# Altium PCB Motherboard.PcbDoc
Units mm, origin at the board's own origin, x right, y up, seen from the top; angles counter-clockwise.
Board outline 29.5 x 50.36 mm, 2 copper layers (Top Layer, Bottom Layer); 8 components, 13 nets, 52 pads, 0 vias.
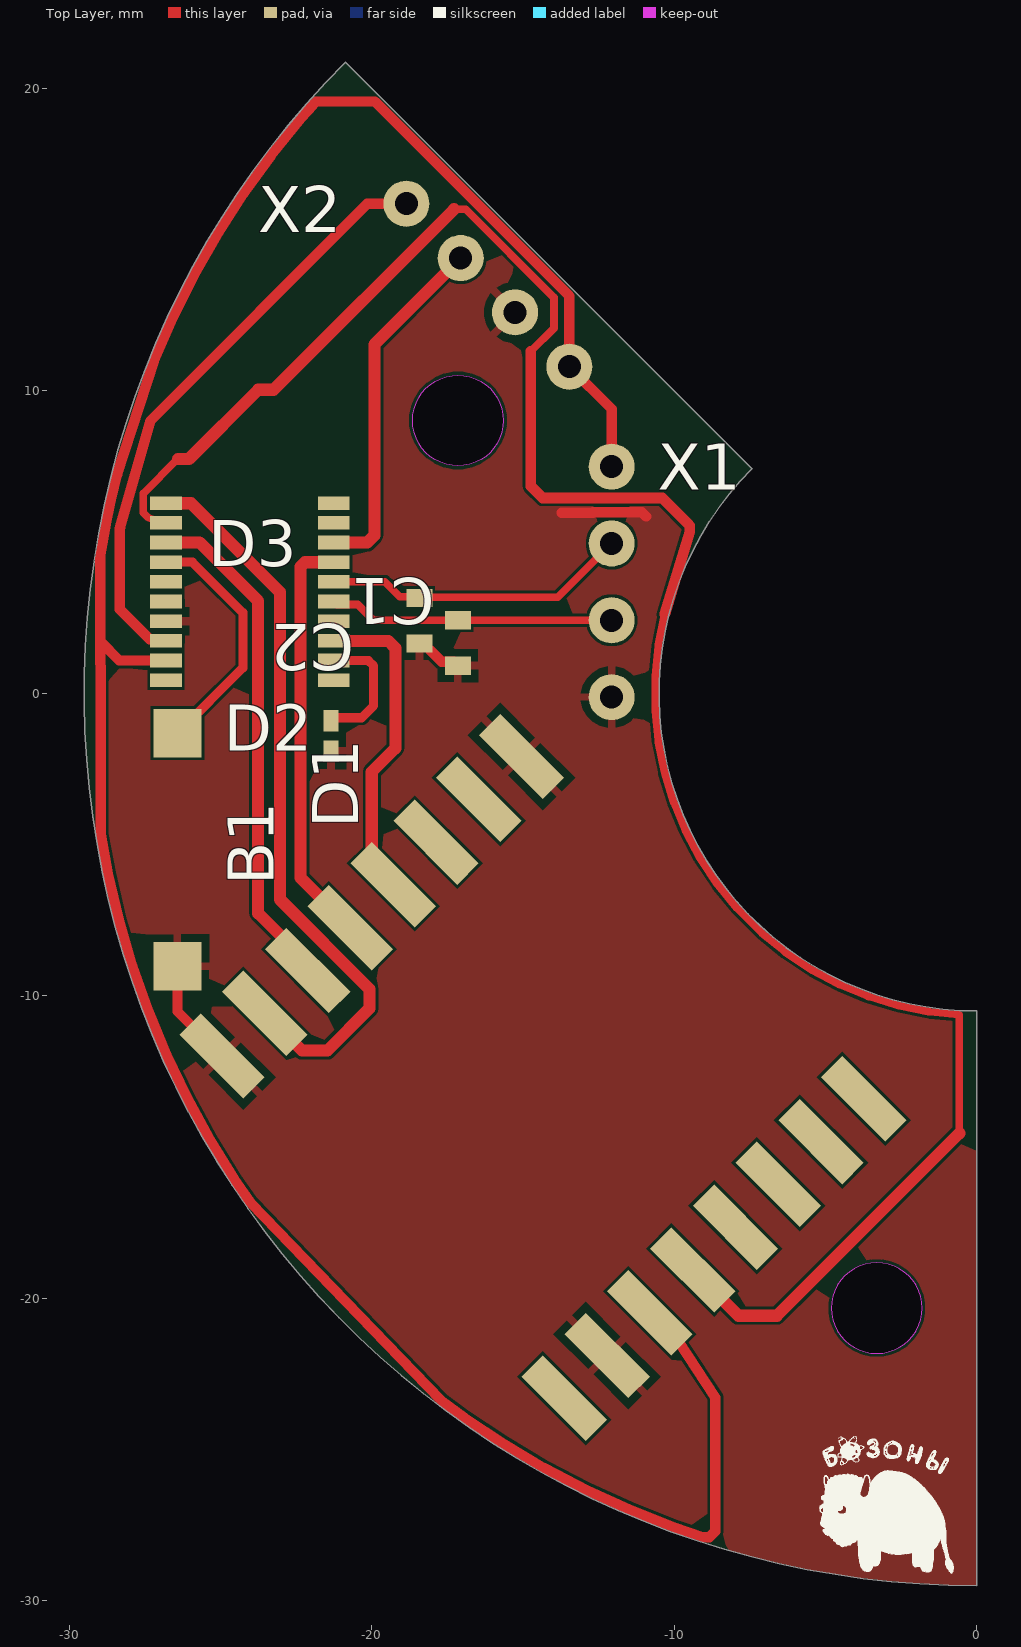
[diagram p0: Top Layer view]
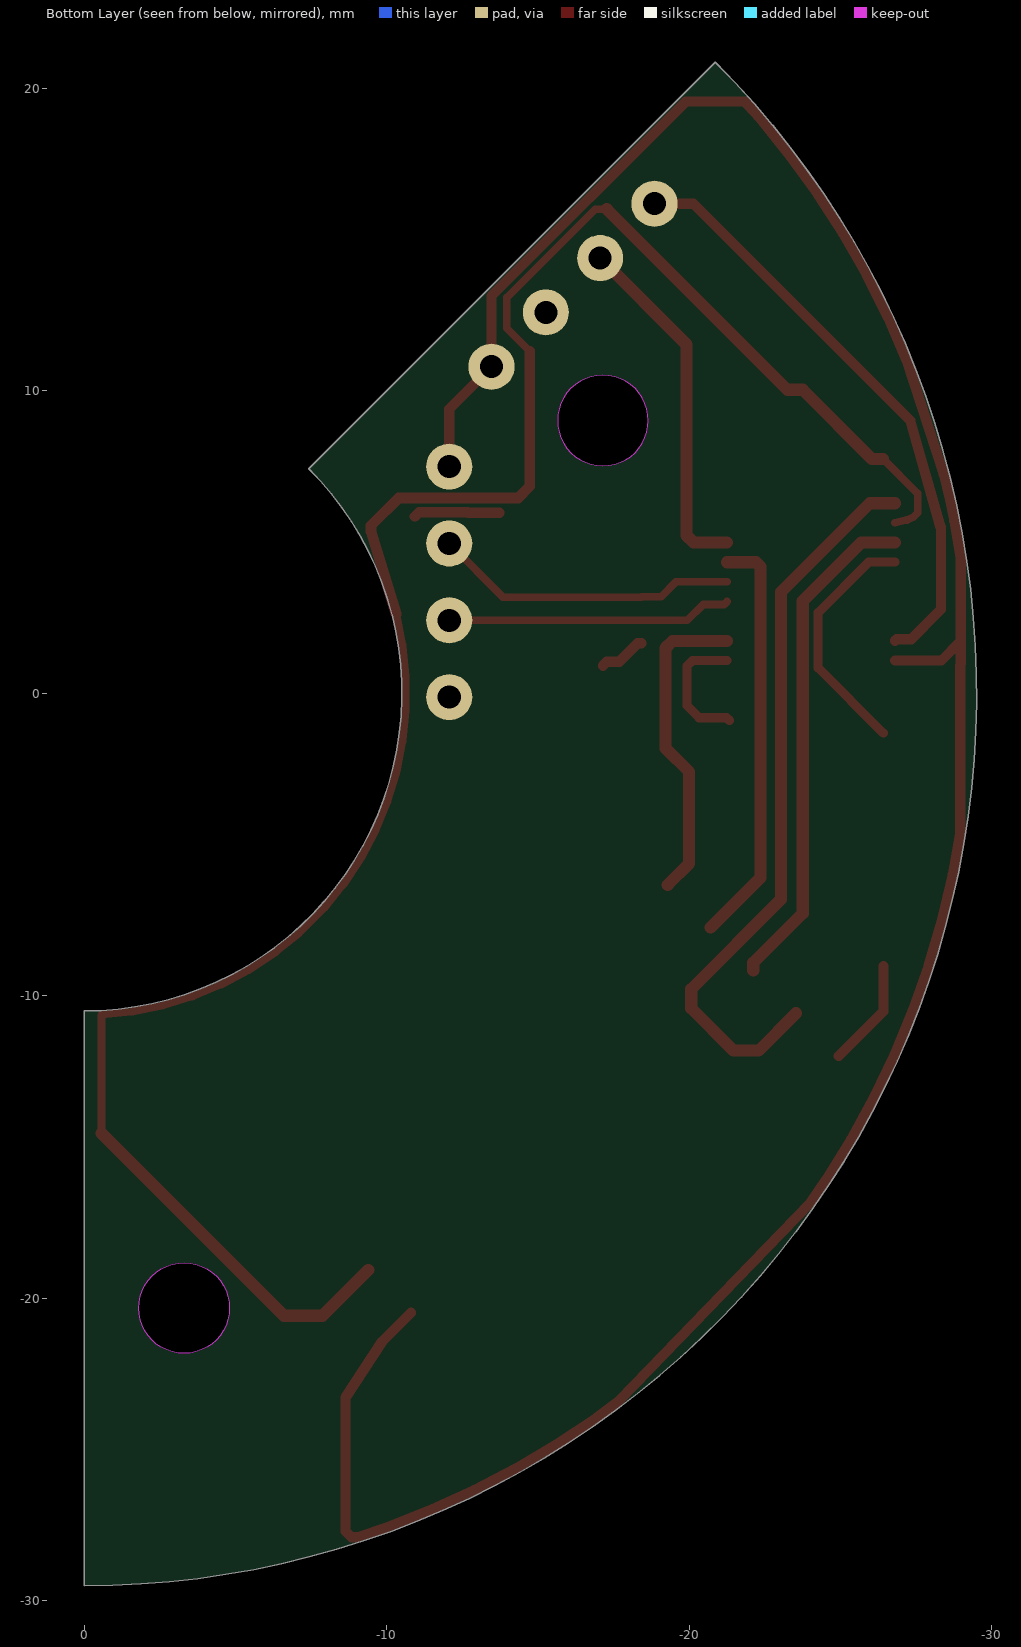
[diagram p1: Bottom Layer view, seen from below]
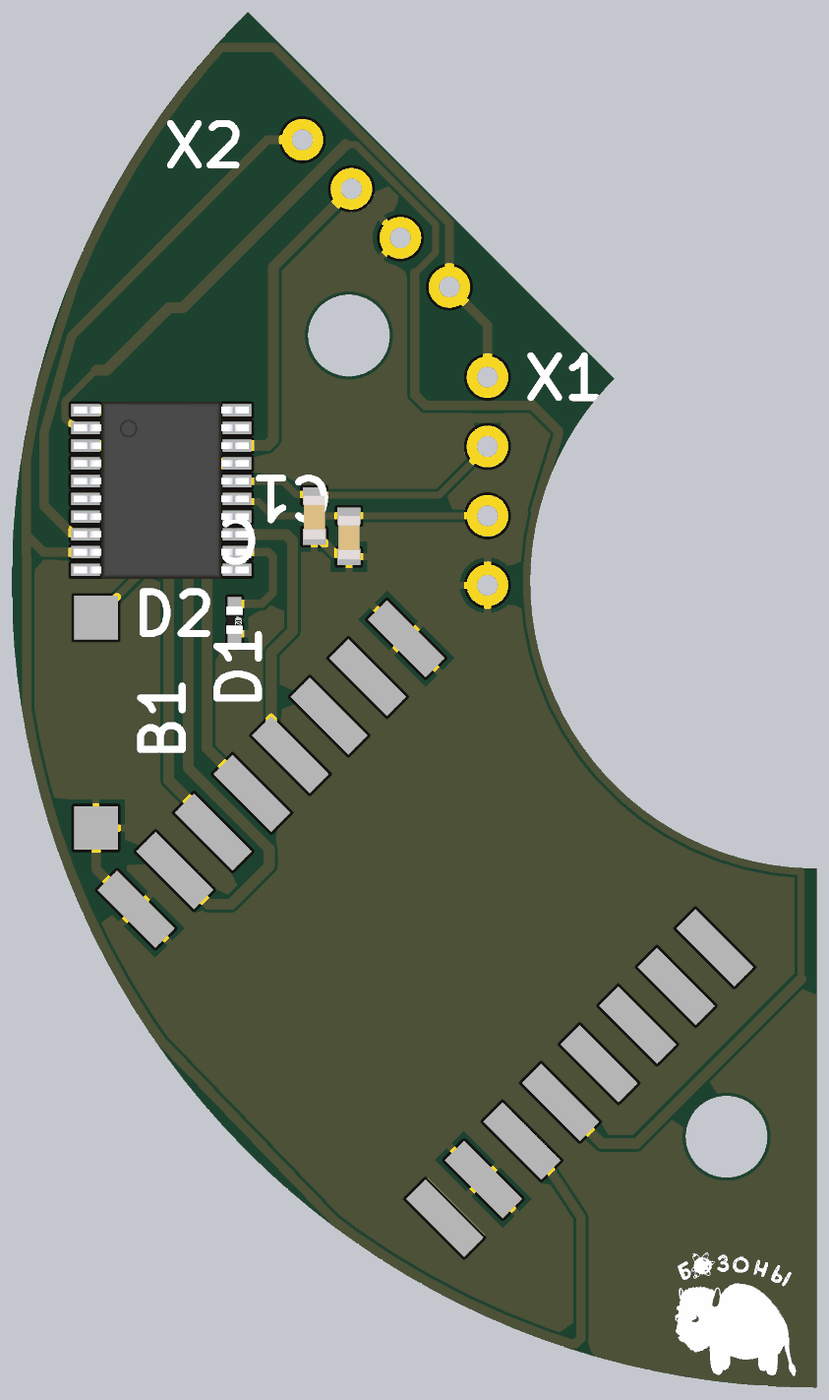
[diagram p2: 3D render of the assembled board from above, using the file's embedded part models]

## Layer stack, top to bottom
Top Solder: solder mask 0.0102, Solder Resist, Dk 3.5
Top Layer: signal copper 0.0356
Dielectric 1: dielectric 0.32, FR-4, Dk 4.8
Bottom Layer: signal copper 0.0356
Bottom Solder: solder mask 0.0102, Solder Resist, Dk 3.5

## Board outline
0,-29.5 cw(c0,0) -20.86,20.86 -7.425,7.425 ccw(c0,0) 0,-10.5
cut-out: -4.802,-20.32 ccw(c-3.302,-20.32) -3.302,-21.82 ccw(c-3.302,-20.32) -1.802,-20.32 ccw(c-3.302,-20.32) -3.302,-18.82 ccw(c-3.302,-20.32)
cut-out: -17.145,7.517 cw(c-17.145,9.017) -18.645,9.017 cw(c-17.145,9.017) -17.145,10.517 cw(c-17.145,9.017) -15.645,9.017 cw(c-17.145,9.017)

## Design rules (kind name [scope] priority, off if disabled: settings)
BoardOutlineClearance [All] p1: gap=0.01 ignorepadtopadclearanceinfootprint=FALSE
Clearance Clearance_1 [All] p1: gap=0.1 ignorepadtopadclearanceinfootprint=FALSE
Height [All] p1: minheight=0 maxheight=45 prefheight=12.7
PolygonConnect [All] p1: connectstyle=Relief reliefconductorwidth=0.254 reliefentries=4 polygonreliefangle="90 Angle" airgapwidth=0.254
RoutingVias [All] p1: holewidth=0.711 width=1.27 viastyle="Through Hole" minholewidth=0.711 minwidth=1.27 maxholewidth=0.711 maxwidth=1.27
SolderMaskExpansion [All] p1: expansion=0.102 istentingtop=FALSE
SupplyNets "Schematic Supply Nets_1" [InNet('GND')] p1: voltage=0.000
SupplyNets "Schematic Supply Nets" [InNet('VCC')] p2: voltage=0.000
Width [All] p1: maxlimit=2 minlimit=0.2 preferedwidth=0.254
29 further rules are at their usual default settings.

## Components (designator, comment, footprint, x,y, rotation, side; value= is the part's Value field where it differs from the comment)
B1 "Кнопка" Button -26.416,-1.317 r270 top
C1 "Конденсатор" "0603 cap" -17.145,0.913 r90 top
C2 "Конденсатор" "0603 cap" -18.415,1.651 r90 top
D1 "светодиод" "0402 res" -21.336,-0.905 r270 top
D2 "XL-1278-SMT(LoRa)" SX1278_V1.2 -3.73,-13.404 r135 top
D3 "PY32F002B" TSSOP20 -26.797,6.283 r270 top
X1 "4х1 папа" "NEMA17 разъём" -12.065,7.493 r180 top
X2 "4х1 папа" "NEMA17 разъём" -18.85,16.183 r225 top

## Footprints (in the part's own frame and the unit in brackets; to place one, negate y for a bottom-side part, rotate by r counter-clockwise, add the part's x,y. Pads: shape width x height; smd on the part's side, far side on the other; paste and mask are expansions set on the pad)
"0402 res" [mm]
  rect 0.7x0.5 smd: 0(0,0) 1(1,0)
  body extent 0,-0.3 1,0.3, height 0.2
"0603 cap" [mm]
  rect 0.6x0.85 smd: 0(0,0) 1(1.5,0)
  body extent -0.1,-0.4 1.5,0.4, height 0.78
Button [mm]
  rect 1.6x1.6 smd: 1(0,0) 2(7.7,0)
"NEMA17 разъём" [mil]
  round 60 hole 30: 1(0,300) 2(0,200) 3(0,100) 4(0,0)
  body extent -48,-50 50,350, height 415
SX1278_V1.2 [mm]
  rect 3x1 smd: 1(16,14) 2(0,4) 3(0,2) 4(0,0) 5(0,10) 6(16,8) 7(16,10) 8(16,6) 9(16,12) 10(0,6) 11(0,8) 12(16,0) 13(0,14) 14(0,12) 15(16,2) 16(16,4)
  body extent -2.5,-1.5 17.5,16.5, height 44
TSSOP20 [mm]
  rect 0.45x1.05 smd: 0(1.95,0) 1(2.6,0) 2(3.25,0) 3(3.9,0) 4(4.55,0) 5(5.2,0) 6(5.85,0) 7(5.85,5.55) 8(5.2,5.55) 9(4.55,5.55) 10(3.9,5.55) 11(3.25,5.55) 12(2.6,5.55) 13(1.95,5.55) 14(1.3,5.55) 15(0.65,5.55) 16(0,5.55) 17(0,0) 18(0.65,0) 19(1.3,0)
  body extent -0.33,-0.43 6.18,5.98, height 1

## Part data
D2: "Радиомодуль"
D3: "МК"
X1 X2: "Разъём"

## Nets (pads, with @x,y where several pads share a name; then routed paths per layer and width w, separated by ;. In a path a pad name is that pad's centre, name@x,y a point inside that pad or via, vN(x,y) a via of type N, cw(c..) or ccw(c..) an arc to the next point about the centre after c; other vN are vias at no path point)
GND: B1.2 C1.0 C2.0 D1.1 D2.1 D2.12 D2.14 D3.3 X1.1 X2.2 | length 8
  Top Layer w0.34: B1.2 -26.416,-10.517 D2.1 ; C2.0 -18.29,1.651 -17.682,1.043 -17.275,1.043 C1.0 ; -13.716,5.969 -12.685,5.969 -12.669,5.985 -11.065,5.985 -10.922,5.842
MISO: D2.6 D3.13 | length 13.8
  Top Layer w0.4: D3.13 -22.203,4.333 -22.352,4.184 -22.352,-6.096 D2.6
NetB1_1: B1.1 D3.0 | length 8.1
  Top Layer w0.3: D3.0 -25.923,4.333 -24.257,2.667 -24.257,0.842 B1.1
NetC1_1: C1.1 D3.11 X1.2 | length 9.4
  Top Layer w0.254: D3.11 -21.149,2.935 -20.459,2.935 -19.937,2.413 C1.1 X1.2
NetC2_1: C2.1 D3.12 X1.3 | length 10.1
  Top Layer w0.254: D3.12 -19.56,3.683 -19.072,3.195 -18.435,3.195 -18.415,3.175 -13.843,3.175 X1.3
NetD1_0: D1.0 D3.8 | length 4.3
  Top Layer w0.3: D1.0@-21.329,-0.905 -21.329,-0.9 -21.236,-0.807 -20.327,-0.807 -19.93,-0.41 -19.93,0.907 -20.106,1.083 D3.8
NetD2_7: D2.7 D3.19 | length 16.7
  Top Layer w0.4: D3.19 -25.684,4.983 -23.749,3.048 -23.749,-7.273 -22.115,-8.907 D2.7
NetD2_9: D2.9 D3.17 | length 24.5
  Top Layer w0.4: D3.17 -25.968,6.283 -23.028,3.343 -23.028,-6.817 -20.066,-9.779 -20.066,-10.414 -21.463,-11.811 -22.294,-11.811 D2.9
RST: D2.11 D3.18 | length 70.2
  Top Layer w0.254: D3.18 -27.195,5.731 -27.416,5.831 -27.549,5.964 -27.549,6.602 -26.404,7.747 ; -17.272,16.002 -16.891,16.002 -13.97,13.081 -13.97,12.065 -14.732,11.303 ; -10.312,2.619 -10.322,2.572 -10.518,1.603 -10.523,1.554 -10.624,0.572 -10.624,-0.572 -10.619,-0.577 -10.523,-1.547 -10.523,-1.554 -10.518,-1.603 -10.322,-2.572 -10.312,-2.619 -10.023,-3.565 -10.007,-3.61 -9.629,-4.524 -9.608,-4.567 -9.143,-5.44 -9.117,-5.481 -8.571,-6.304 -8.54,-6.342 -7.917,-7.108 -7.108,-7.917 -6.342,-8.54 -6.304,-8.571 -5.481,-9.117 -5.44,-9.143 -4.567,-9.608 -4.524,-9.629 -3.61,-10.007 -3.565,-10.023 -2.619,-10.312 -2.572,-10.322 -1.603,-10.518 -1.554,-10.523 -0.573,-10.623 -0.573,-14.543 ; -9.542,5.605 -9.478,5.541
  Top Layer w0.35: -14.732,11.303 -14.732,6.842 -14.346,6.456 -10.393,6.456 -9.542,5.605 ; -10.312,2.619 -9.478,5.351 -9.478,5.541
  Top Layer w0.4: -26.404,7.747 -26.035,7.747 -23.749,10.033 -23.241,10.033 -17.272,16.002 ; D2.11 -7.874,-20.574 -6.604,-20.574 -0.573,-14.543
SCLK: D2.8 D3.9 | length 10.6
  Top Layer w0.4: D3.9 -19.449,1.733 -19.214,1.499 -19.214,-1.815 -19.994,-2.595 -19.994,-5.626 D2.8
SWC: D3.14 X2.3 | length 11.8
  Top Layer w0.4: D3.14 -20.143,4.983 -19.909,5.217 -19.909,11.532 X2.3
SWD: D3.4 X2.4 | length 19.8
  Top Layer w0.34: D3.4 -26.852,1.788 -27.334,1.788 -28.221,2.676 -28.321,2.775 -28.321,5.445 -28.31,5.489 -27.305,9.017 -20.139,16.183 X2.4
VCC: D2.5 D3.5 X1.4 X2.1 | length 86.4
  Top Layer w0.34: D3.5 -28.338,1.083 -28.972,1.717 ; -13.562,13.234 -13.462,13.134 X2.1 -12.065,9.398 X1.4 ; -13.562,13.234 -19.786,19.458 -19.886,19.558 -21.833,19.558 -21.939,19.452 -22.337,19.009 -23.322,17.786 -24.177,16.601 -24.241,16.512 -25.09,15.191 -25.867,13.826 -26.57,12.422 -27.193,10.99 -28.411,7.245 -28.603,6.49 -28.761,5.698 -28.972,4.493 -28.972,1.717 ; D2.5 -9.859,-21.413 -8.636,-23.274 -8.636,-27.696 -8.835,-27.896 -9.031,-27.896 -10.004,-27.572 -11.466,-26.997 -11.474,-26.993 -12.894,-26.344 -14.286,-25.616 -15.636,-24.815 -16.942,-23.942 -17.672,-23.396 -17.692,-23.376 -24.01,-16.828 -24.026,-16.806 -24.532,-16.077 -25.357,-14.741 -26.11,-13.362 -26.114,-13.354 -26.788,-11.946 -27.389,-10.495 -27.911,-9.014 -28.351,-7.516 -28.354,-7.507 -28.713,-5.987 -28.715,-5.979 -28.951,-4.671 -28.956,-4.641 -28.956,0.889 -28.972,1.008 -28.972,1.717
pads on no net: D2.2 D2.3 D2.4 D2.10 D2.13 D2.15 D2.16 D3.1 D3.2 D3.6 D3.7 D3.10 D3.15 D3.16

## Polygon pours and split planes (outlines as drawn)
GND on Top Layer "GND_L01_P000" (solid, remove dead copper, pour order 0): -35.56,26.162 -33.274,23.876 7.62,23.876 7.62,-29.972 2.921,-34.671 2.794,-34.544 -35.814,-34.544

## Silkscreen, mask and mechanical layers (free items; w line width, h text height)
Top Overlay:
  drawing of 8 lines, arcs and shapes, not listed
Mechanical 1:
  circle w0.254: c-3.302,-20.32 r1.5
  circle w0.254: c-17.145,9.017 r1.5
  lines w0.254: -20.86,20.86 ccw(c0,0) 0,-29.5 0,-10.5 cw(c0,0) -7.425,7.425 -20.86,20.86